# Altium PCB ANALOG_CAN2.PcbDoc (part 1 of 2)
Units mm, origin at the board's own origin, x right, y up, seen from the top; angles counter-clockwise.
Board outline 100 x 55 mm, 2 copper layers (Top Layer, Bottom Layer); 137 components, 132 nets, 459 pads, 72 vias.
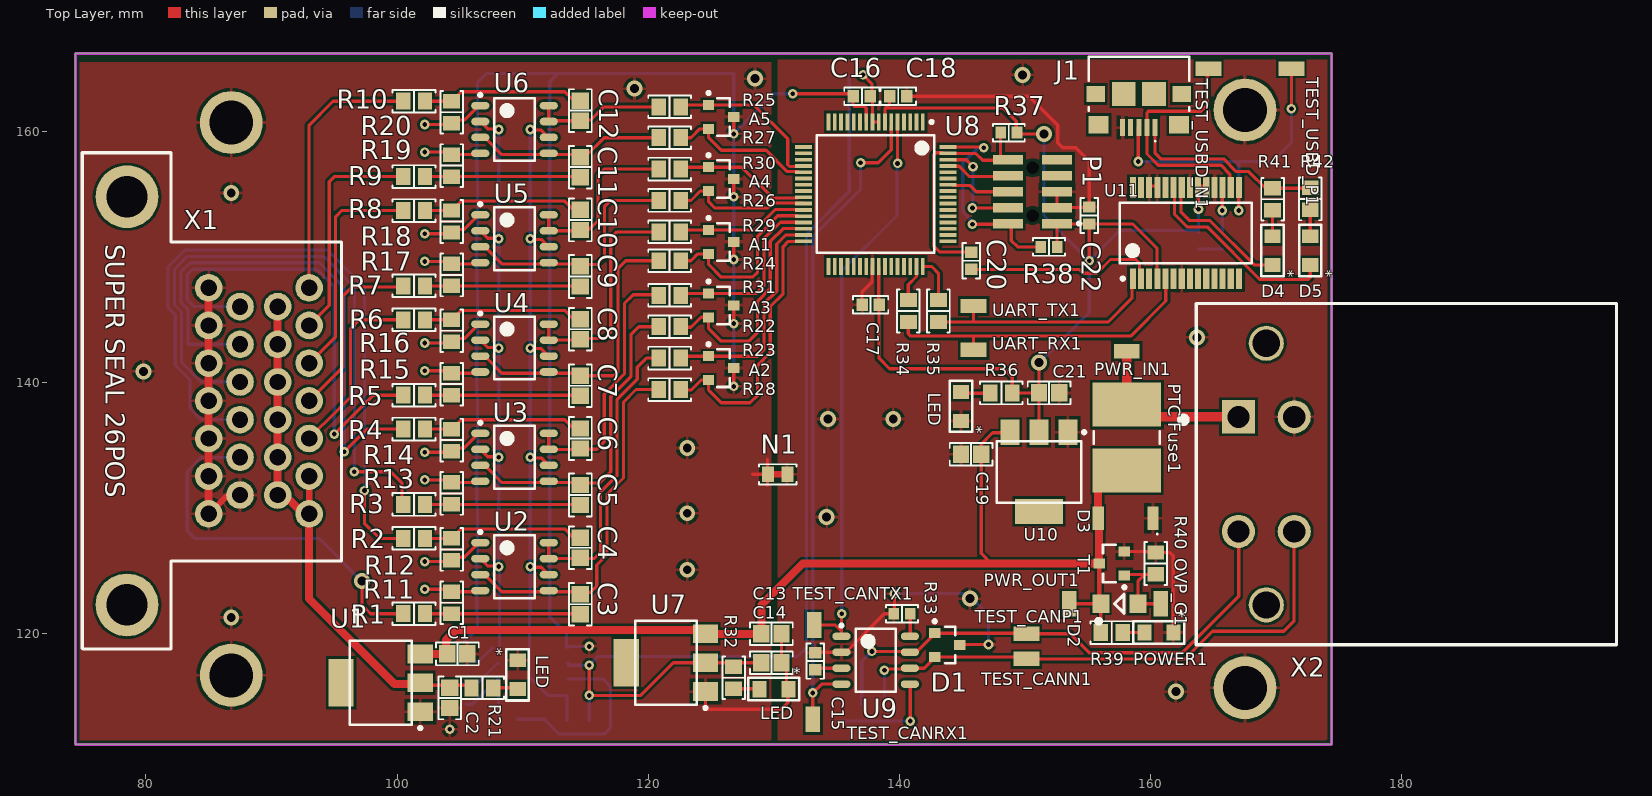
[diagram p0: Top Layer view]
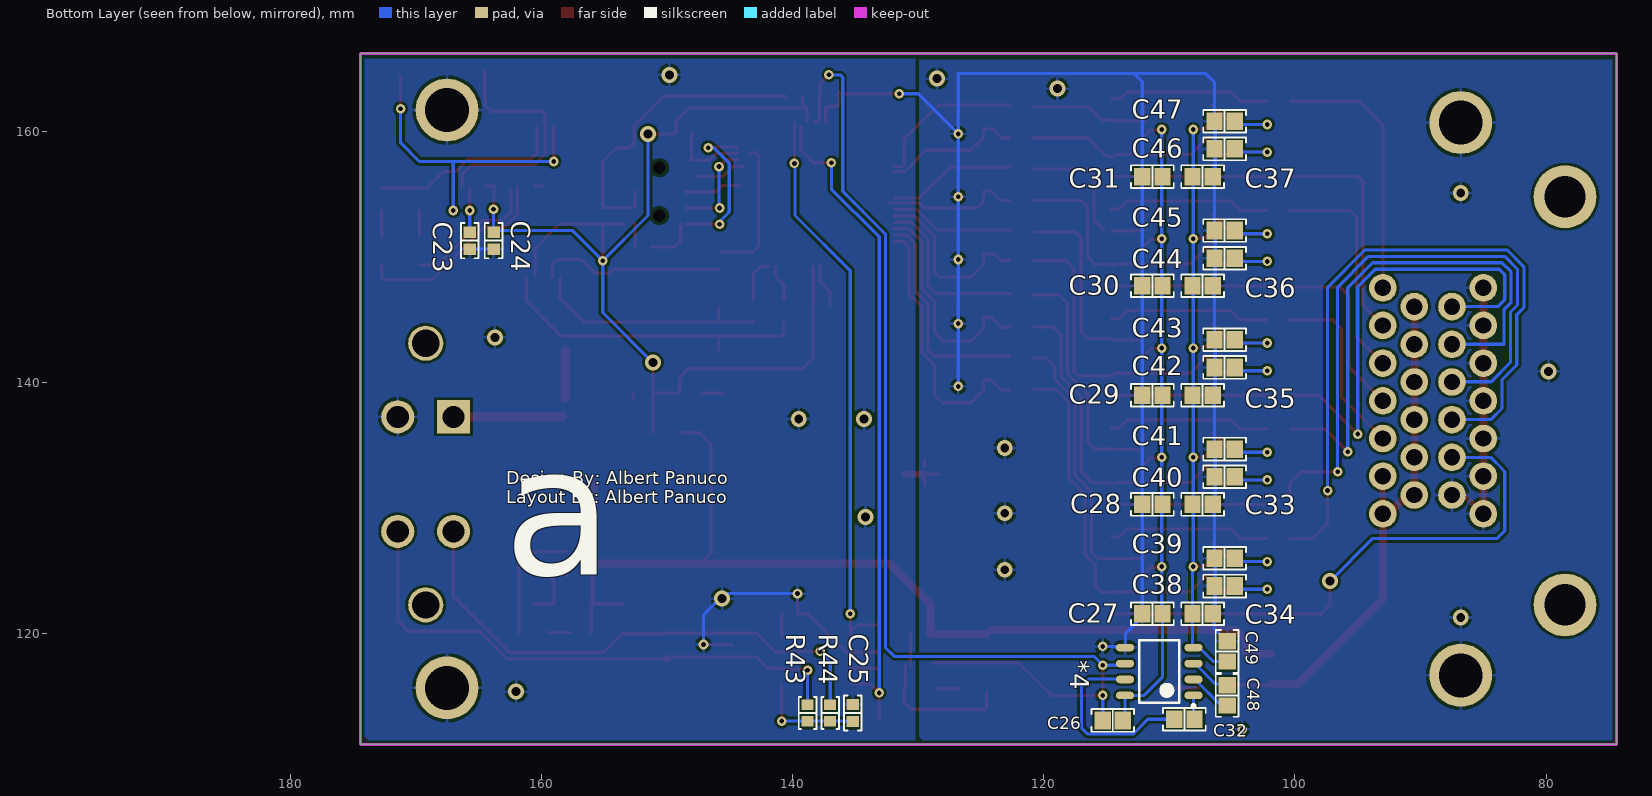
[diagram p1: Bottom Layer view, seen from below]
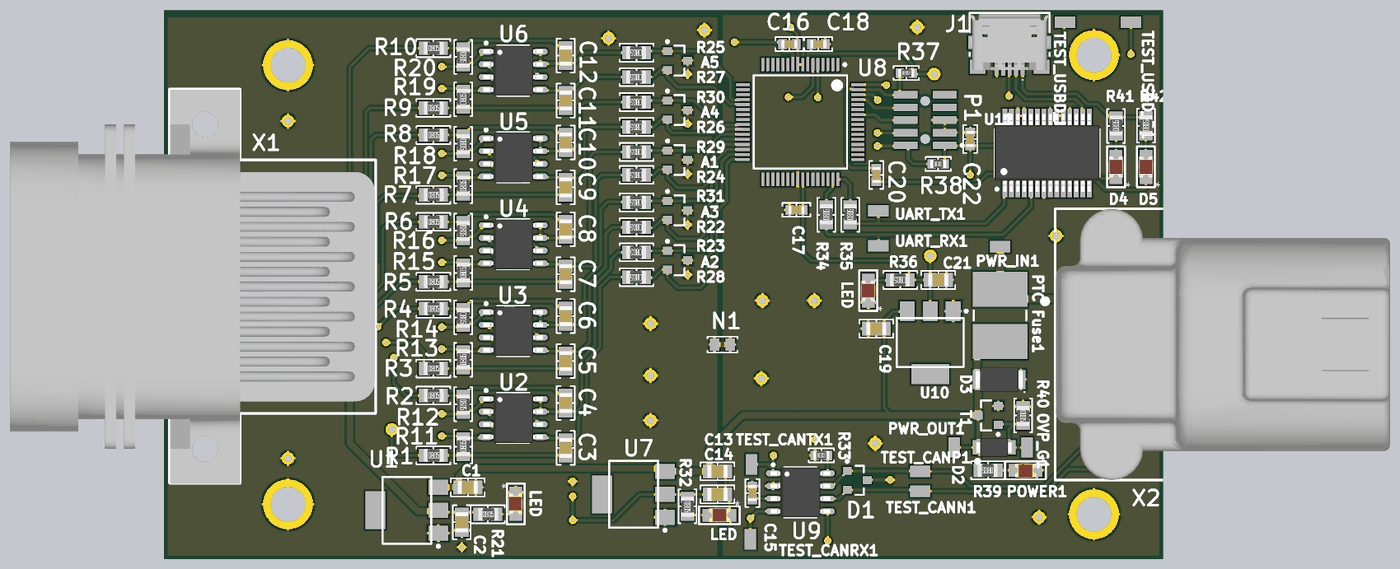
[diagram p3: 3D render of the assembled board from above, using the file's embedded part models]
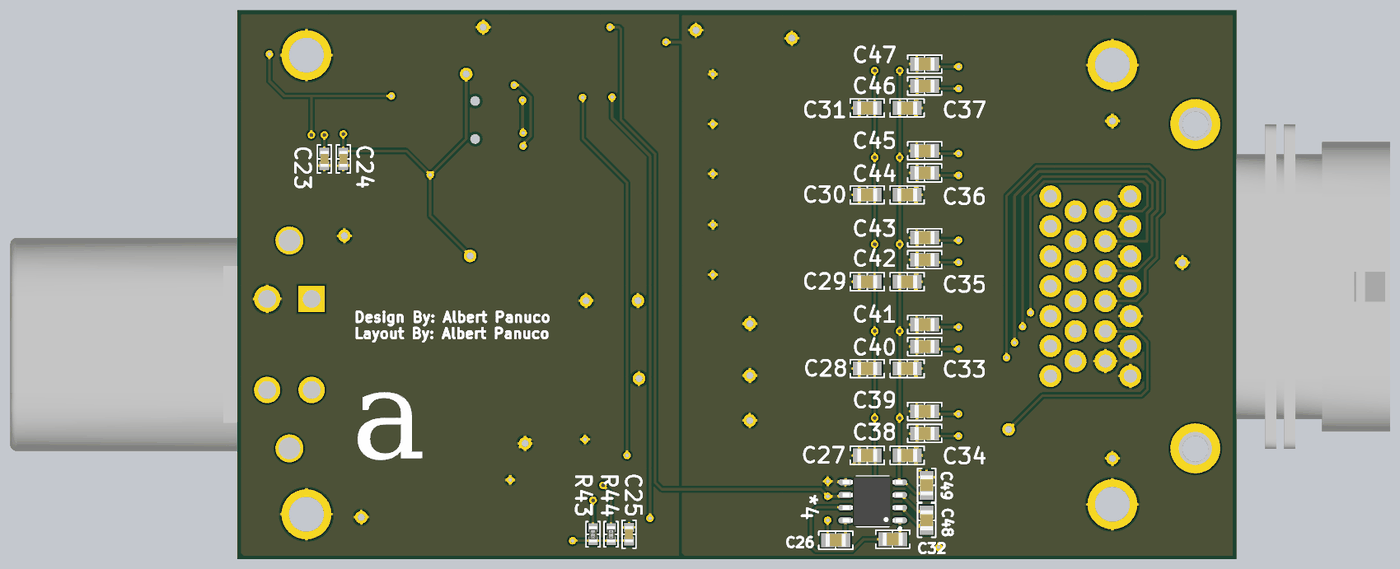
[diagram p4: 3D render of the assembled board from below, using the file's embedded part models]

## Layer stack, top to bottom
Top Solder: solder mask 0.0102, Solder Resist, Dk 3.5
Top Layer: signal copper 0.0356
Dielectric 1: dielectric 0.32, FR-4, Dk 4.8
Bottom Layer: signal copper 0.0356
Bottom Solder: solder mask 0.0102, Solder Resist, Dk 3.5

## Board outline
74.4,111.2 174.4,111.2 174.4,166.2 74.4,166.2

## Design rules (kind name [scope] priority, off if disabled: settings)
BoardOutlineClearance [All] p1: gap=0.254 ignorepadtopadclearanceinfootprint=FALSE except(0: Arc-SplitContinuation Track-SplitContinuation SMDPad-SplitContinuation THPad-SplitContinuation Via-SplitContinuation Fill-SplitContinuation Poly-SplitContinuation Region-SplitContinuation Text-SplitContinuation)
Clearance [All] p1: gap=0.203 ignorepadtopadclearanceinfootprint=FALSE except(0.152: SMDPad-SMDPad; 0.254: Fill-Hole Poly-Hole Region-Hole)
DiffPairsRouting [All] p1: maxlimit=0.254 minlimit=0.254 mostfreqgap=0.254 toplayer_minwidth=0.381 toplayer_maxwidth=0.381 toplayer_prefwidth=0.381 bottomlayer_minwidth=0.381 bottomlayer_maxwidth=0.381 bottomlayer_prefwidth=0.381 maxuncoupledlength=12.7
MatchedLengths "Schematic Matched Net Lengths" [InNet('D_N')] p1: tolerance=0.254 checknetsindiffpair=FALSE checkdiffpairvsdiffpair=TRUE checkxsignals=TRUE checkothers=TRUE
PolygonConnect [All] p1: connectstyle=Relief reliefconductorwidth=0.254 reliefentries=4 polygonreliefangle="90 Angle" airgapwidth=0.254
RoutingVias [All] p1: holewidth=0.711 width=1.27 viastyle="Through Hole" minholewidth=0.711 minwidth=1.27 maxholewidth=0.711 maxwidth=1.27
SolderMaskExpansion [All] p1: expansion=0.102
Width [All] p1: maxlimit=5.08 minlimit=0.254 preferedwidth=0.254 minimp=50.000000 maximp=50.000000 favimp=50.000000
29 further rules are at their usual default settings.

## Classes and differential pairs
component class U_OVP_MCU_PINS: A1 A2 A3 A4 A5 R7 R9 R10 R11 R15 R23 R25 R30 R31 R34 R53 R66
channel class "Sallen-Key Filter": "U_Sallen-Key Filter1" "U_Sallen-Key Filter2" "U_Sallen-Key Filter3" "U_Sallen-Key Filter4" "U_Sallen-Key Filter5"
component class U_USB: C3 C16 C20 D4 D5 J1 R11 R23 R25 R34 R49 TEST_USBD_N1 TEST_USBD_P1 U8 UART_RX1 UART_TX1
component class "U_Sallen-Key Filter5": C7 C18_SKF1 C19-SKF1 C29 C32 C35 C42 C43 C48 C49 OP_SKF1 R5 R15 R15_SKF1 R16 R17_SKF1 R25 R75 R76 R77 R78 U4
component class "U_Sallen-Key Filter4": C2 C6 "C22_U_Sallen-Key Filter4" C28 C33 C40 C41 R23 R34 R35 R39 U1
component class "U_Sallen-Key Filter3": C9 C10 C30 C36 C44 C45 C54 C55 C56 C57 R7 R17 R30 R33 U8
component class "U_Sallen-Key Filter2": C11 "C22_U_Sallen-Key Filter2" C25 C31 C37 C46 C47 R9 R10 R20 R38 R67 R69 R70 R71 U6
component class "U_Sallen-Key Filter1": C3 C16 "C20_U_Sallen-Key Filter1" "C22_U_Sallen-Key Filter1" C27 C34 C38 C39 R11 R31 R32 R36 R68 R72 R73 R74 U2 "U4_U_Sallen-Key Filter1"
component class U_RVP_OVP_LC: D2 D3 OVP_G1 POWER1 PWR_IN1 PWR_OUT1 R5 R39 T1
component class U_MCU_MKE185F512VLH16: C16 C18 C20 C22 P1 R20 R38 TEST_CANRX1 TEST_CANTX1 U6
component class U_MAX680_10V_Converter: *4 C9 C10 C11 C25
component class U_Connectors: X1 X2
component class U_CAN_Tranceiver: C6 C25 D3 R16 R17 R33 TEST_CANN1 TEST_CANP1 U8
component class "U_5V Reference": *4 *6 *7 C3 C6 C7 C16 C22 C32 LED R32 R35 R36 R103 U1 U2 U4
component class TopLevel: N1 "PTC Fuse1"
differential pair D: +D_P -D_N

## Components (designator, comment, footprint, x,y, rotation, side; value= is the part's Value field where it differs from the comment)
*4 "Null" SOIC-8 110.8,117 r0 bottom value=10V
A1 "AZ23C4V7-7-F" SOT23-3 125.8,151.2 r0 top value=4.7V (schematic designator A3)
A2 "AZ23C4V7-7-F" SOT23-3 125.8,141.15 r0 top value=4.7V (schematic designator A5)
A3 "AZ23C4V7-7-F" SOT23-3 125.8,146.15 r0 top value=4.7V (schematic designator A4)
A4 "AZ23C4V7-7-F" SOT23-3 125.8,156.2 r0 top value=4.7V (schematic designator A2)
A5 "AZ23C4V7-7-F" SOT23-3 125.8,161.15 r0 top value=4.7V (schematic designator A1)
C1 "Capacitor MLCC 2.2uf 25V CAP 0805/2012" "CAP 0805/2012" 104.8,118.4 r180 top value=2.2uf (schematic designator C6)
C2 "Capacitor MLCC 2.2uf 25V CAP 0805/2012" "CAP 0805/2012" 104.2,114.9 r90 top value=2.2uf (schematic designator C5)
C3 "Capacitor MLCC 0.10uf 25V CAP 0805/2012" "CAP 0805/2012" 114.6,122.35 r90 top value=0.10uf (schematic designator C23)
C4 "Capacitor MLCC 0.10uf 25V CAP 0805/2012" "CAP 0805/2012" 114.6,126.85 r270 top value=0.10uf (schematic designator C20)
C5 "Capacitor MLCC 0.10uf 25V CAP 0805/2012" "CAP 0805/2012" 114.6,131.05 r90 top value=0.10uf (schematic designator C23)
C6 "Capacitor MLCC 0.10uf 25V CAP 0805/2012" "CAP 0805/2012" 114.6,135.55 r270 top value=0.10uf (schematic designator C20)
C7 "Capacitor MLCC 0.10uf 25V CAP 0805/2012" "CAP 0805/2012" 114.6,139.75 r90 top value=0.10uf (schematic designator C23)
C8 "Capacitor MLCC 0.10uf 25V CAP 0805/2012" "CAP 0805/2012" 114.6,144.25 r270 top value=0.10uf (schematic designator C20)
C9 "Capacitor MLCC 0.10uf 25V CAP 0805/2012" "CAP 0805/2012" 114.6,148.45 r90 top value=0.10uf (schematic designator C23)
C10 "Capacitor MLCC 0.10uf 25V CAP 0805/2012" "CAP 0805/2012" 114.6,152.95 r270 top value=0.10uf (schematic designator C20)
C11 "Capacitor MLCC 0.10uf 25V CAP 0805/2012" "CAP 0805/2012" 114.6,157.15 r90 top value=0.10uf (schematic designator C23)
C12 "Capacitor MLCC 0.10uf 25V CAP 0805/2012" "CAP 0805/2012" 114.6,161.65 r270 top value=0.10uf (schematic designator C20)
C13 "Capacitor MLCC 2.2uf 25V CAP 0805/2012" "CAP 0805/2012" 129.8,120 r180 top value=2.2uf (schematic designator C3)
C14 "Capacitor MLCC 2.2uf 25V CAP 0805/2012" "CAP 0805/2012" 129.8,117.7 r180 top value=2.2uf (schematic designator C4)
C15 "Capacitor MLCC 0.10uf 50V CAP 0603/1608" "CAP 0603/1608" 133.3,117.825 r270 top value=0.10uf (schematic designator C11)
C16 "Capacitor MLCC 0.10uf 25V CAP 0603/1608" "CAP 0603/1608" 137,162.8 r0 top value=0.10uf (schematic designator C14)
C17 "Capacitor MLCC 100pf 25V CAP 0603/1608" "CAP 0603/1608" 137.7,146.2 r0 top value=100pf (schematic designator C15)
C18 "Capacitor MLCC 0.10uf 25V CAP 0603/1608" "CAP 0603/1608" 139.9,162.8 r180 top value=0.10uf (schematic designator C16)
C19 "Capacitor MLCC 2.2uf 25V CAP 0805/2012" "CAP 0805/2012" 145.7,134.3 r0 top value=2.2uf (schematic designator C1)
C20 "Capacitor MLCC 0.10uf 25V CAP 0603/1608" "CAP 0603/1608" 145.7,149.7 r90 top value=0.10uf (schematic designator C17)
C21 "Capacitor MLCC 2.2uf 25V CAP 0805/2012" "CAP 0805/2012" 151.909,139.179 r180 top value=2.2uf (schematic designator C2)
C22 "Capacitor MLCC 0.10uf 16V CAP 0603/1608" "CAP 0603/1608" 155.1,153.3 r270 top value=0.10uf (schematic designator C13)
C23 "Capacitor MLCC 0.10uf 25V CAP 0603/1608" "CAP 0603/1608" 165.7,151.3 r90 bottom value=0.10uf (schematic designator C19)
C24 "Capacitor MLCC 0.10uf 25V CAP 0603/1608" "CAP 0603/1608" 163.8,151.3 r90 bottom value=0.10uf (schematic designator C18)
C25 "Capacitor MLCC 4700pf 50V CAP 0603/1608" "CAP 0603/1608" 135.2,113.7 r270 bottom value=4700pf (schematic designator C12)
C26 "Capacitor MLCC 4.7uf 16V CAP 0805/2012" "CAP 0805/2012" 114.5,113.1 r0 bottom value=4.7uf (schematic designator C7)
C27 "Capacitor MLCC 0.10uf 25V CAP 0805/2012" "CAP 0805/2012" 111.35,121.6 r180 bottom value=0.10uf (schematic designator C21)
C28 "Capacitor MLCC 0.10uf 25V CAP 0805/2012" "CAP 0805/2012" 111.35,130.3 r180 bottom value=0.10uf (schematic designator C21)
C29 "Capacitor MLCC 0.10uf 25V CAP 0805/2012" "CAP 0805/2012" 111.35,139 r180 bottom value=0.10uf (schematic designator C21)
C30 "Capacitor MLCC 0.10uf 25V CAP 0805/2012" "CAP 0805/2012" 111.35,147.7 r180 bottom value=0.10uf (schematic designator C21)
C31 "Capacitor MLCC 0.10uf 25V CAP 0805/2012" "CAP 0805/2012" 111.35,156.4 r180 bottom value=0.10uf (schematic designator C21)
C32 "Capacitor MLCC 4.7uf 16V CAP 0805/2012" "CAP 0805/2012" 108.8,113.2 r0 bottom value=4.7uf (schematic designator C8)
C33 "Capacitor MLCC 0.10uf 25V CAP 0805/2012" "CAP 0805/2012" 107.35,130.3 r180 bottom value=0.10uf (schematic designator C24)
C34 "Capacitor MLCC 0.10uf 25V CAP 0805/2012" "CAP 0805/2012" 107.35,121.6 r180 bottom value=0.10uf (schematic designator C24)
C35 "Capacitor MLCC 0.10uf 25V CAP 0805/2012" "CAP 0805/2012" 107.35,139 r180 bottom value=0.10uf (schematic designator C24)
C36 "Capacitor MLCC 0.10uf 25V CAP 0805/2012" "CAP 0805/2012" 107.35,147.7 r180 bottom value=0.10uf (schematic designator C24)
C37 "Capacitor MLCC 0.10uf 25V CAP 0805/2012" "CAP 0805/2012" 107.35,156.4 r180 bottom value=0.10uf (schematic designator C24)
C38 "Capacitor MLCC 2200pf 25V CAP 0805/2012" "CAP 0805/2012" 105.6,123.804 r180 bottom value=2200pf (schematic designator C25)
C39 "Capacitor MLCC 2200pf 25V CAP 0805/2012" "CAP 0805/2012" 105.6,126.009 r180 bottom value=2200pf (schematic designator C22)
C40 "Capacitor MLCC 2200pf 25V CAP 0805/2012" "CAP 0805/2012" 105.6,132.504 r180 bottom value=2200pf (schematic designator C25)
C41 "Capacitor MLCC 2200pf 25V CAP 0805/2012" "CAP 0805/2012" 105.6,134.709 r180 bottom value=2200pf (schematic designator C22)
C42 "Capacitor MLCC 2200pf 25V CAP 0805/2012" "CAP 0805/2012" 105.6,141.204 r180 bottom value=2200pf (schematic designator C25)
C43 "Capacitor MLCC 2200pf 25V CAP 0805/2012" "CAP 0805/2012" 105.6,143.409 r180 bottom value=2200pf (schematic designator C22)
C44 "Capacitor MLCC 2200pf 25V CAP 0805/2012" "CAP 0805/2012" 105.6,149.904 r180 bottom value=2200pf (schematic designator C25)
C45 "Capacitor MLCC 2200pf 25V CAP 0805/2012" "CAP 0805/2012" 105.6,152.108 r180 bottom value=2200pf (schematic designator C22)
C46 "Capacitor MLCC 2200pf 25V CAP 0805/2012" "CAP 0805/2012" 105.6,158.604 r180 bottom value=2200pf (schematic designator C25)
C47 "Capacitor MLCC 2200pf 25V CAP 0805/2012" "CAP 0805/2012" 105.6,160.808 r180 bottom value=2200pf (schematic designator C22)
C48 "Capacitor MLCC 4.7uf 16V CAP 0805/2012" "CAP 0805/2012" 105.4,115.1 r270 bottom value=4.7uf (schematic designator C9)
C49 "Capacitor MLCC 4.7uf 16V CAP 0805/2012" "CAP 0805/2012" 105.4,118.6 r270 bottom value=4.7uf (schematic designator C10)
D1 "NUP1105LT1G" "SOT-23 (TO-236)" 143.8,119.1 r0 top value=TVS_24V (schematic designator D3)
D2 "DDZ9701-7" SOD123F 157.5,122.4 r180 top value=14Vz (schematic designator D1)
D3 "DIODE" SOD-128 158,129.2 r180 top value=5A (schematic designator D2)
D4 "" 0805_LED 169.7,150.5 r270 top value=Red (schematic designator D5)
D5 "" 0805_LED 172.7,150.5 r270 top value=Green (schematic designator D4)
J1 "1981568-1" TECO-1981568-5_V 159.05,160.3 r180 top value=CONN
LED "LED" 0805_LED 109.6,116.75 r90 top value=Green (schematic designator *3)
LED "LED" 0805_LED 130,115.6 r0 top value=Green (schematic designator *2)
LED "LED" 0805_LED 144.9,138.1 r270 top value=Green (schematic designator *1)
N1 "Net_Tie" Net_Tie 130.3,132.7 r0 top net-tie
OVP_G1 "RCU-0C" RCU-0C 160.8,122.4 r180 top
P1 "5103309-1" HDR2X5_SMT 150.6,155.2 r90 top value=CONN
POWER1 "LED" 0805_LED 160.65,120.1 r0 top value=Green
"PTC Fuse1" "PTC Fuse" "PTC Fuse 2920/07351" 158.1,135.625 r90 top value="2A hold, 4A trip, 40A max"
PWR_IN1 "RCU-0C" RCU-0C 158.1,142.5 r270 top
PWR_OUT1 "RCU-0C" RCU-0C 153.5,122.4 r180 top
R1 "Resistor 24k 0805 1/10W 1%" "RES 0805/2012" 101.35,121.6 r0 top value=24k (schematic designator R27)
R2 "Resistor 24k 0805 1/10W 1%" "RES 0805/2012" 101.35,127.6 r0 top value=24k (schematic designator R25)
R3 "Resistor 24k 0805 1/10W 1%" "RES 0805/2012" 101.35,130.3 r0 top value=24k (schematic designator R27)
R4 "Resistor 24k 0805 1/10W 1%" "RES 0805/2012" 101.35,136.3 r0 top value=24k (schematic designator R25)
R5 "Resistor 24k 0805 1/10W 1%" "RES 0805/2012" 101.35,139 r0 top value=24k (schematic designator R27)
R6 "Resistor 24k 0805 1/10W 1%" "RES 0805/2012" 101.35,145 r0 top value=24k (schematic designator R25)
R7 "Resistor 24k 0805 1/10W 1%" "RES 0805/2012" 101.35,147.7 r0 top value=24k (schematic designator R27)
R8 "Resistor 24k 0805 1/10W 1%" "RES 0805/2012" 101.35,153.7 r0 top value=24k (schematic designator R25)
R9 "Resistor 24k 0805 1/10W 1%" "RES 0805/2012" 101.35,156.4 r0 top value=24k (schematic designator R27)
R10 "Resistor 24k 0805 1/10W 1%" "RES 0805/2012" 101.35,162.4 r0 top value=24k (schematic designator R25)
R11 "Resistor 9.1k 0805 1/10W 1%" "RES 0805/2012" 104.35,122.475 r90 top value=9.1k (schematic designator R28)
R12 "Resistor 9.1k 0805 1/10W 1%" "RES 0805/2012" 104.35,126.725 r270 top value=9.1k (schematic designator R26)
R13 "Resistor 9.1k 0805 1/10W 1%" "RES 0805/2012" 104.35,131.175 r90 top value=9.1k (schematic designator R28)
R14 "Resistor 9.1k 0805 1/10W 1%" "RES 0805/2012" 104.35,135.425 r270 top value=9.1k (schematic designator R26)
R15 "Resistor 9.1k 0805 1/10W 1%" "RES 0805/2012" 104.35,139.875 r90 top value=9.1k (schematic designator R28)
R16 "Resistor 9.1k 0805 1/10W 1%" "RES 0805/2012" 104.35,144.125 r270 top value=9.1k (schematic designator R26)
R17 "Resistor 9.1k 0805 1/10W 1%" "RES 0805/2012" 104.35,148.575 r90 top value=9.1k (schematic designator R28)
R18 "Resistor 9.1k 0805 1/10W 1%" "RES 0805/2012" 104.35,152.825 r270 top value=9.1k (schematic designator R26)
R19 "Resistor 9.1k 0805 1/10W 1%" "RES 0805/2012" 104.35,157.275 r90 top value=9.1k (schematic designator R28)
R20 "Resistor 9.1k 0805 1/10W 1%" "RES 0805/2012" 104.35,161.525 r270 top value=9.1k (schematic designator R26)
R21 "Resistor 470 0805 1/10W 1%" "RES 0805/2012" 106.8,115.7 r0 top value=470 (schematic designator R3)
R22 "Resistor 2.2k 0805 1/4W 5%" "RES 0805/2012" 121.7,144.45 r180 top value=2.2k (schematic designator R13)
R23 "Resistor 2.2k 0805 1/4W 5%" "RES 0805/2012" 121.7,141.95 r180 top value=2.2k (schematic designator R14)
R24 "Resistor 2.2k 0805 1/4W 5%" "RES 0805/2012" 121.7,149.7 r180 top value=2.2k (schematic designator R11)
R25 "Resistor 2.2k 0805 1/4W 5%" "RES 0805/2012" 121.7,161.95 r180 top value=2.2k (schematic designator R6)
R26 "Resistor 2.2k 0805 1/4W 5%" "RES 0805/2012" 121.7,154.5 r180 top value=2.2k (schematic designator R9)
R27 "Resistor 2.2k 0805 1/4W 5%" "RES 0805/2012" 121.7,159.5 r180 top value=2.2k (schematic designator R7)
R28 "Resistor 2.2k 0805 1/4W 5%" "RES 0805/2012" 121.7,139.45 r180 top value=2.2k (schematic designator R15)
R29 "Resistor 2.2k 0805 1/4W 5%" "RES 0805/2012" 121.7,152 r180 top value=2.2k (schematic designator R10)
R30 "Resistor 2.2k 0805 1/4W 5%" "RES 0805/2012" 121.7,157 r180 top value=2.2k (schematic designator R8)
R31 "Resistor 2.2k 0805 1/4W 5%" "RES 0805/2012" 121.7,146.95 r180 top value=2.2k (schematic designator R12)
R32 "Resistor 470 0805 1/10W 1%" "RES 0805/2012" 126.8,116.5 r270 top value=470 (schematic designator R2)
R33 "Resistor 100 0603 1/10W 10%" "RES 0603/1608" 140.2,121.6 r0 top value=100 (schematic designator R18)
R34 "Resistor 1.0k 0805 1/4W 1%" "RES 0805/2012" 140.7,145.7 r90 top value=1.0k (schematic designator R22)
R35 "Resistor 1.0k 0805 1/4W 1%" "RES 0805/2012" 143.1,145.7 r90 top value=1.0k (schematic designator R21)
R36 "Resistor 470 0805 1/10W 1%" "RES 0805/2012" 148.105,139.179 r180 top value=470 (schematic designator R1)
R37 "Resistor 10k 0603 1/10W 5%" "RES 0603/1608" 148.7,159.9 r0 top value=10k (schematic designator R20)
R38 "Resistor 10k 0603 1/10W 1%" "RES 0603/1608" 151.9,150.8 r0 top value=10k (schematic designator R19)
R39 "Resistor 470 0805 1/10W 1%" "RES 0805/2012" 156.9,120.1 r180 top value=470 (schematic designator R4)
R40 "Resistor 47k 0805 1/10W 1%" "RES 0805/2012" 160.4,125.6 r270 top value=47k (schematic designator R5)
R41 "Resistor 1.0k 0805 1/4W 1%" "RES 0805/2012" 169.7,154.6 r90 top value=1.0k (schematic designator R24)
R42 "Resistor 1.0k 0805 1/4W 1%" "RES 0805/2012" 172.7,154.625 r90 top value=1.0k (schematic designator R23)
R43 "Resistor 62 0603 1/10W 5%" "RES 0603/1608" 138.8,113.7 r270 bottom value=62 (schematic designator R16)
R44 "Resistor 62 0603 1/10W 5%" "RES 0603/1608" 137,113.7 r90 bottom value=62 (schematic designator R17)
T1 "DMG2302UK-7" SOT23-3 156.9,125.6 r180 top value=N_Channel
TEST_CANN1 "RCU-0C" RCU-0C 150.1,118 r90 top
TEST_CANP1 "RCU-0C" RCU-0C 150.1,120 r90 top
TEST_CANRX1 "RCU-0C" RCU-0C 133.1,113.2 r180 top
TEST_CANTX1 "RCU-0C" RCU-0C 133.2,120.7 r180 top
TEST_USBD_N1 "RCU-0C" RCU-0C 164.6,165 r90 top
TEST_USBD_P1 "RCU-0C" RCU-0C 171.2,165 r90 top
U1 "NCP1117ST33T3G" SOT-223-3 98.7,116.1 r180 top value="3.3V 1.0A" (schematic designator U3)
U2 "LT1057IS8#PBF" SOIC-8 109.35,125.35 r0 top (schematic designator U7)
U3 "LT1057IS8#PBF" SOIC-8 109.35,134.05 r0 top (schematic designator U7)
U4 "LT1057IS8#PBF" SOIC-8 109.35,142.75 r0 top (schematic designator U7)
U5 "LT1057IS8#PBF" SOIC-8 109.35,151.45 r0 top (schematic designator U7)
U6 "LT1057IS8#PBF" SOIC-8 109.35,160.15 r0 top (schematic designator U7)
U7 "NCP1117ST33T3G" SOT-223-3 121.4,117.7 r180 top value="3.3V 1.0A" (schematic designator U2)
U8 "" TQFP64 138.1,155 r270 top (schematic designator U5)
U9 "MCP2561 CAN Transceiver" SOIC-8 138.1,117.9 r0 top value=CAN/UART (schematic designator U4)
U10 "NCP1117ST33T3G" SOT-223-3 151.1,132.9 r270 top value="3.3V 1.0A" (schematic designator U1)
U11 "FT232RL" SSOP-28 162.8,151.9 r90 top (schematic designator U6)
UART_RX1 "RCU-0C" RCU-0C 145.9,142.6 r270 top
UART_TX1 "RCU-0C" RCU-0C 145.9,146.1 r270 top
X1 "6437288-4" "SUPERSEAL 26POS 90Deg" 78.5,154.8 r270 top value=CONN (schematic designator X2)
X2 "DTF13-4P" DTF13-4P 169.2,132.715 r90 top value=CONN (schematic designator X1)

## Footprints (in the part's own frame and the unit in brackets; to place one, negate y for a bottom-side part, rotate by r counter-clockwise, add the part's x,y. Pads: shape width x height; smd on the part's side, far side on the other; paste and mask are expansions set on the pad)
0805_LED [mm]
  rect 1.1x1.3 smd: 1(-1.15,0) 2(1.15,0)
  silkscreen extent -2.06,-0.89 2.03,0.89, body extent -1.05,-0.67 1.05,0.68, height 0.9
"CAP 0603/1608" [mm] "Chip Capacitor, 2-Leads, Body 1.60x0.80mm, IPC Medium Density"
  rect 0.9x1 smd: 1(-0.675,0) 2(0.675,0)
  silkscreen extent -1.4,-0.7 1.4,0.7, body extent -0.8,-0.41 0.8,0.41, height 0.82
"CAP 0805/2012" [mm] "Chip Capacitor, 2-Leads, Body 2.00x1.20mm, IPC Medium Density"
  rect 1.3x1.4 smd: 1(-0.8,0) 2(0.8,0)
  silkscreen extent -1.7,-0.9 1.7,0.9, body extent -1,-0.64 1,0.64, height 1.26
DTF13-4P [mm]
  rect 2.64x2.64 hole 1.76: 1(4.561,2.223)
  round 2.64 hole 1.76: 2(4.561,-2.227) 3(-4.559,-2.227) 4(-4.559,2.223)
  round 2.8 hole 2.16 unplated: None(-10.415,0) None(10.415,0)
  silkscreen extent -13.59,-27.88 13.59,6.85, body extent -13.59,-27.94 13.59,5.52, height 23.53
HDR2X5_SMT [mm] "Header, 10-Leads, Body 3.43x6.35mm, Pitch 1.27mm"
  rect 0.76x2.4 smd: 1(-2.54,-1.95) 2(-2.54,1.95) 3(-1.27,-1.95) 4(-1.27,1.95) 5(0,-1.95) 6(0,1.95) 7(1.27,-1.95) 8(1.27,1.95) 9(2.54,-1.95) 10(2.54,1.95)
  round 0 hole 1 unplated: MH1(-1.905,0) MH2(1.905,0)
  silkscreen extent -2.66,-3.83 -2.42,-3.58, body extent -3.17,-1.72 3.17,1.72, height 4.55
Net_Tie [mm] "Chip Resistor, 2-Leads, Body 2.00x1.25mm, IPC High Density"
  rect 0.95x1.25 smd: 1(-0.775,0) 2(0.775,0)
  Top Layer lines w0.5: -0.8,0 0.775,0 0.8,0
  silkscreen extent -1.5,-0.8 1.5,0.8
"PTC Fuse 2920/07351" [mm] "Chip PTC Fuse, 2-Leads, Body 7.36x5.12mm, IPC Medium Density"
  rect 3.5x5.45 smd: 1(-2.625,0) 2(2.625,0)
  silkscreen extent -0.5,-2.63 0.5,2.63, body extent -3.99,-2.72 3.99,2.72, height 1.25
RCU-0C [mm]
  rect 1.15x2.05 smd: 1(0,0)
"RES 0603/1608" [mm] "Chip Resistor, 2-Leads, Body 1.60x0.80mm, IPC Medium Density"
  rect 0.85x0.95 smd: 1(-0.65,0) 2(0.65,0)
  silkscreen extent -1.27,-0.7 1.27,0.7, body extent -0.8,-0.4 0.8,0.4, height 0.45
"RES 0805/2012" [mm] "Chip Resistor, 2-Leads, Body 2.00x1.25mm, IPC Medium Density"
  rect 1.15x1.35 smd: 1(-0.875,0) 2(0.875,0)
  silkscreen extent -1.7,-0.9 1.7,0.9, body extent -0.95,-0.62 1.05,0.63, height 0.6
SOD123F [mm] "SODFL, 2-Leads, Body 1.80x3.50mm, IPC Low Density"
  rect 1.35x1.45 smd: 1(-1.475,0) 2(1.475,0)
  silkscreen extent -0.38,-0.76 1.75,1.5, body extent -1.75,-0.95 1.75,0.95, height 1.15
SOD-128 [mm] "SOD-128, 2-Leads, Body 2.40x4.70mm, IPC Medium Density"
  rect 0.9x1.9 smd: 1(-2.175,0) 2(2.175,0)
  silkscreen extent -2.57,1.2 -2.48,1.3, body extent -2.35,-1.25 2.35,1.25, height 0.85
SOIC-8 [mm] "SOIC, 8-Leads, Body 4.90x3.90mm, Pitch 1.27mm, IPC Medium Density"
  oval 1.45x0.6 smd: 1(-2.725,1.905) 2(-2.725,0.635) 3(-2.725,-0.635) 4(-2.725,-1.905) 5(2.725,-1.905) 6(2.725,-0.635) 7(2.725,0.635) 8(2.725,1.905)
  silkscreen extent -2.85,-2.5 1.6,2.88, body extent -3,-2.5 3,2.5, height 1.75
SOT23-3 [mm] "SOT23, 3-Leads, Body 2.92x2.37mm, Pitch 0.95mm, IPC Medium Density, NUP2105L"
  rect 0.9x0.8 smd: 1(-1,0.95) 2(-1,-0.95) 3(1,0)
  silkscreen extent -1.12,-1.5 0.7,2.02, body extent -0.7,-1.52 0.7,1.52, height 1.11
"SOT-23 (TO-236)" [mm]
  rect 0.9x0.8 smd: 1(-1,0.95) 2(-1,-0.95) 3(1,0)
  silkscreen extent -1.12,-1.46 0.65,2.02, body extent -0.65,-1.46 0.65,1.46, height 1.11
SOT-223-3 [mm] "SOT223127P600-8N, NCP1117STAT3G, MMBT4403-7-F"
  rect 2x1.5 smd: 1(-3.15,2.3) 2(-3.15,0) 3(-3.15,-2.3)
  rect 2x3.8 smd: THM(3.15,0)
  silkscreen extent -3.27,-3.35 2.45,3.72, body extent -1.85,-3.35 1.85,3.35, height 1.8
SSOP-28 [mm] "hi"
  rect 1.65x0.49 smd: 1(-3.625,4.225) 2(-3.625,3.575) 3(-3.625,2.925) 4(-3.625,2.275) 5(-3.625,1.625) 6(-3.625,0.975) 7(-3.625,0.325) 8(-3.625,-0.325) 9(-3.625,-0.975) 10(-3.625,-1.625) 11(-3.625,-2.275) 12(-3.625,-2.925) 13(-3.625,-3.575) 14(-3.625,-4.225) 15(3.625,-4.225) 16(3.625,-3.575) 17(3.625,-2.925) 18(3.625,-2.275) 19(3.625,-1.625) 20(3.625,-0.975) 21(3.625,-0.325) 22(3.625,0.325) 23(3.625,0.975) 24(3.625,1.625) 25(3.625,2.275) 26(3.625,2.925) 27(3.625,3.575) 28(3.625,4.225)
  silkscreen extent -3.75,-5.25 2.4,5.25, body extent -3.9,-5.25 3.9,5.25, height 2
"SUPERSEAL 26POS 90Deg" [mm]
  round 2.2 hole 1.3: 1(7.25,14.5) 2(10.25,14.5) 3(13.25,14.5) 4(16.25,14.5) 5(19.25,14.5) 6(22.25,14.5) 7(25.25,14.5) 8(8.75,12) 9(11.75,12) 10(14.75,12) 11(17.75,12) 12(20.75,12) 13(23.75,12) 14(8.75,9) 15(11.75,9) 16(14.75,9) 17(17.75,9) 18(20.75,9) 19(23.75,9) 20(7.25,6.5) 21(10.25,6.5) 22(13.25,6.5) 23(16.25,6.5) 24(19.25,6.5) 25(22.25,6.5) 26(25.25,6.5)
  round 5 hole 3.3 unplated: CH(0,0) RH(32.5,0)
  silkscreen extent -3.5,-3.56 36,17.07, body extent -3.45,-19.5 36.05,17, height 27.91
TECO-1981568-5_V [mm] "SMD, 5-Leads, Body 8x5.9mm, Pitch 0.65mm"
  rect 0.4x1.35 smd: 1(-1.3,0) 2(-0.65,0) 3(0,0) 4(0.65,0) 5(1.3,0)
  rect 1.6x1.4 smd: 6(-3.2,-0.225) 7(3.2,-0.225)
  rect 1.45x1.3 smd: 8(-3.425,-2.675) 9(3.425,-2.675)
  rect 1.9x1.9 smd: 10(-1.2,-2.675) 11(1.2,-2.675)
  silkscreen extent -4,-5.63 4,1.12, body extent -4,-5.5 4,0.1, height 2.79
TQFP64 [mm] "TSQFP, 64-Leads, Body 10.00x10.00mm, Pitch 0.50mm, IPC Medium Density, MKE18F512VLH16"
  rect 1.35x0.3 smd: 1(-5.75,3.75) 2(-5.75,3.25) 3(-5.75,2.75) 4(-5.75,2.25) 5(-5.75,1.75) 6(-5.75,1.25) 7(-5.75,0.75) 8(-5.75,0.25) 9(-5.75,-0.25) 10(-5.75,-0.75) 11(-5.75,-1.25) 12(-5.75,-1.75) 13(-5.75,-2.25) 14(-5.75,-2.75) 15(-5.75,-3.25) 16(-5.75,-3.75) 33(5.75,-3.75) 34(5.75,-3.25) 35(5.75,-2.75) 36(5.75,-2.25) 37(5.75,-1.75) 38(5.75,-1.25) 39(5.75,-0.75) 40(5.75,-0.25) 41(5.75,0.25) 42(5.75,0.75) 43(5.75,1.25) 44(5.75,1.75) 45(5.75,2.25) 46(5.75,2.75) 47(5.75,3.25) 48(5.75,3.75)
  rect 0.3x1.35 smd: 17(-3.75,-5.75) 18(-3.25,-5.75) 19(-2.75,-5.75) 20(-2.25,-5.75) 21(-1.75,-5.75) 22(-1.25,-5.75) 23(-0.75,-5.75) 24(-0.25,-5.75) 25(0.25,-5.75) 26(0.75,-5.75) 27(1.25,-5.75) 28(1.75,-5.75) 29(2.25,-5.75) 30(2.75,-5.75) 31(3.25,-5.75) 32(3.75,-5.75) 49(3.75,5.75) 50(3.25,5.75) 51(2.75,5.75) 52(2.25,5.75) 53(1.75,5.75) 54(1.25,5.75) 55(0.75,5.75) 56(0.25,5.75) 57(-0.25,5.75) 58(-0.75,5.75) 59(-1.25,5.75) 60(-1.75,5.75) 61(-2.25,5.75) 62(-2.75,5.75) 63(-3.25,5.75) 64(-3.75,5.75)
  silkscreen extent -5.87,-4.67 4.67,4.68, body extent -5,-5 5,5, height 1.6

## Part data
*4: library part 14, "IC REG SWTCHD CAP INV 10MA 8SOIC", Current_Rating=10mA, Manufacturer_id=1, MfrPartNo=MAX680CSA, Package=SOIC-8, ComponentLink1Description=Null, ComponentLink1URL=Null, Created_By="Albert Panuco", Drawer_id=1, Dropout_Voltage=Null, idPMIC_Lin=14, Link=https://www.digikey.com/product-detail/en/maxim-integrated/MAX680CSA/MAX680CSA-ND/142563, Name=MAX680CSA, Num_Outputs=2, Output_Config=Fixed, Power=Null, Supplier1=Null, Supplier1PartNo=Null, Updated_By=Null, Vin(Max)=6V, Vin(Min)=2V, Vout(Max)=10V, Vout(Min)=+2Vin, Vout_Type=Null
A1 A2 A3 A4 A5: library part 14, "DIODE ZENER ARRAY 4.7V SOT23-3", Manufacturer_id=1, Package=SOT23-3, Power=300mW, Created_By="Angel Delgado", Drawer_id=1, idDiode=14, Link=https://www.digikey.com/product-detail/en/diodes-incorporated/AZ23C4V7-7-F/AZ23C4V7-FDICT-ND/815309, MfrPartNo=AZ23C4V7-7-F, Name=AZ23C4V7-7-F, Num_Circuits=2, Supplier1=Digi-Key, Type="Zener Array"
C1 C2 C13 C14 C19 C21: library part 711, Dielectric=Ceramic, Manufacturer_id=1, Package="CAP 0805/2012", Voltage_Rating=25V, Created_By="Nick Mah", Created_Date=10/20/2018, Drawer_id=1, idCapacitor=711, Name="Cap_2.2uf_25V_CAP 0805/2012"
C3 C4 C5 C6 C7 C8 C9 C10 C11 C12 C27 C28 C29 C30 C31 C33 C34 C35 C36 C37: library part 703, Dielectric=Ceramic, Manufacturer_id=1, Package="CAP 0805/2012", Voltage_Rating=25V, Created_By="Nick Mah", Created_Date=10/20/2018, Drawer_id=1, idCapacitor=703, Name="Cap_0.10uf_25V_CAP 0805/2012"
C15: library part 943, Dielectric=Ceramic, Manufacturer_id=1, Package="CAP 0603/1608", Voltage_Rating=50V, Created_By="Nick Mah", Created_Date=10/20/2018, Drawer_id=1, idCapacitor=943, Name="Cap_0.10uf_50V_CAP 0603/1608"
C16 C18 C20 C23 C24: library part 583, Dielectric=Ceramic, Manufacturer_id=1, Package="CAP 0603/1608", Voltage_Rating=25V, Created_By="Nick Mah", Created_Date=10/20/2018, Drawer_id=1, idCapacitor=583, Name="Cap_0.10uf_25V_CAP 0603/1608"
C17: library part 529, Dielectric=Ceramic, Manufacturer_id=1, Package="CAP 0603/1608", Voltage_Rating=25V, Created_By="Nick Mah", Created_Date=10/20/2018, Drawer_id=1, idCapacitor=529, Name="Cap_100pf_25V_CAP 0603/1608"
C22: library part 223, Dielectric=Ceramic, Manufacturer_id=1, Package="CAP 0603/1608", Voltage_Rating=16V, Created_By="Nick Mah", Created_Date=10/20/2018, Drawer_id=1, idCapacitor=223, Name="Cap_0.10uf_16V_CAP 0603/1608"
C25: library part 929, Dielectric=Ceramic, Manufacturer_id=1, Package="CAP 0603/1608", Voltage_Rating=50V, Created_By="Nick Mah", Created_Date=10/20/2018, Drawer_id=1, idCapacitor=929, Name="Cap_4700pf_50V_CAP 0603/1608"
C26 C32 C48 C49: library part 353, Dielectric=Ceramic, Manufacturer_id=1, Package="CAP 0805/2012", Voltage_Rating=16V, Created_By="Nick Mah", Created_Date=10/20/2018, Drawer_id=1, idCapacitor=353, Name="Cap_4.7uf_16V_CAP 0805/2012"
C38 C39 C40 C41 C42 C43 C44 C45 C46 C47: library part 681, Dielectric=Ceramic, Manufacturer_id=1, Package="CAP 0805/2012", Voltage_Rating=25V, Created_By="Nick Mah", Created_Date=10/20/2018, Drawer_id=1, idCapacitor=681, Name="Cap_2200pf_25V_CAP 0805/2012"
D1: library part 7, "ESD Protection Diode", Manufacturer_id=1, Package=SOT-23, Power=350W, Supplier1PartNo=NUP1105LT1GOSCT-ND, ComponentLink1URL=https://www.digikey.com/product-detail/en/on-semiconductor/NUP1105LT1G/NUP1105LT1GOSCT-ND/2122067, Drawer_id=1, Ic=8A, idDiode=7, Link=https://www.digikey.com/product-detail/en/on-semiconductor/NUP1105LT1G/NUP1105LT1GOSCT-ND/2122067, MfrPartNo=NUP1105LT1G, Name=SOT-23_350W_Zener, Num_Circuits=1, Supplier1=Digikey, Type=Zener
D2: library part 10, "Zener Diode 14V 500mW ±5% Surface Mount SOD-123", Manufacturer_id=8, Package=SOD-123, Power=500mW, Supplier1PartNo=DDZ9701-7DICT-ND, ComponentLink1Description=Datasheet, ComponentLink1URL=https://www.diodes.com/assets/Datasheets/ds30410.pdf, Drawer_id=1, idDiode=10, Link=https://www.digikey.com/product-detail/en/diodes-incorporated/DDZ9701-7/DDZ9701-7DICT-ND/3877402, MfrPartNo=DDZ9701-7, Name=DDZ9701, Num_Circuits=1, Supplier1=Digi-Key, Type=Zener
D3: library part 12, "DIODE SCHOTTKY 30V 5A TMINIP2", Manufacturer_id=1, MfrPartNo=DB2431200L, Package=SOD-128, Power=30V, Supplier1PartNo=DB2431200LCT-ND, ComponentLink1Description=Datasheet, ComponentLink1URL=https://industrial.panasonic.com/content/data/SC/ds/ds4/DB2431200L_E.pdf, Drawer_id=1, Ic=5A, idDiode=12, Link=https://www.digikey.com/product-detail/en/panasonic-electronic-components/DB2431200L/DB2431200LCT-ND/3884430, Name=DB2431200L, Num_Circuits=1, Supplier1=Digi-Key, Type=Schottky
D4: library part 1, Package=0805, Drawer_id=1, idLED=1, Manufacturer_id=1, Name=LED_0805_RED, Vf=0.7V
D5 LED LED LED POWER1: library part 2, Manufacturer_id=1, Package=0805, Brightness=7mcd, Drawer_id=1, Id=20mA, idLED=2, Link=https://www.digikey.com/product-detail/en/visual-communications-company-vcc/CMD17-21VGD-TR8/L62505CT-ND/254936, Name=CMD17_0805_GREEN, Vf=2.1V
J1: library part 5, "USB Micro Type B", Manufacturer_id=1, ComponentLink1Description=Datasheet, Created_By=Aiku, Created_Date=10/20/2018, Drawer_id=1, idConn=5, Link=https://www.mouser.com/ProductDetail/TE-Connectivity-AMP/1981568-1?qs=sGAEpiMZZMulM8LPOQ%252bykzEIUPbUCiSfqsfxH3Oq%252bYo%3d, MfrPartNo=1981568-1, Name="TE USB Micro", Num_Contacts=5, Supplier1=TE
N1 U8: library part 1, Drawer_id=1, Manufacturer_id=1
  N1: idFuse=3, idShunt=1, Name="Net Tie"
  U8: idMCU=1, Name="MKE18F512VLH16 MCU"
OVP_G1 PWR_IN1 PWR_OUT1 TEST_CANN1 TEST_CANP1 TEST_CANRX1 TEST_CANTX1 TEST_USBD_N1 TEST_USBD_P1 UART_RX1 UART_TX1: library part 5, Manufacturer_id=1, Package=0603, ComponentLink1Description=Datasheet, ComponentLink1URL=https://www.te.com/commerce/DocumentDelivery/DDEController?Action=srchrtrv&DocNm=1773266&DocType=DS&DocLang=English, Drawer_id=1, idTable=5, Link=https://www.digikey.com/product-detail/en/te-connectivity-amp-connectors/RCU-0C/A106145CT-ND/3477802, MfrPartNo=RCU-0C, Name=RCU-0C_Test_Point
P1: library part 4, "2 row connector", Manufacturer_id=1, Voltage_Rating=None, ComponentLink1Description=Datasheet, Created_By=Aiku, Drawer_id=1, idConn=4, Link=https://www.digikey.com/product-detail/en/5103309-1/A33160-ND/1114898?utm_campaign=buynow&WT.z_cid=ref_octopart_dkc_buynow&utm_medium=aggregator&curr=usd&site=us&utm_source=octopart, MfrPartNo=5103309-1, Name=CONN_TE_2X5POS, Num_Contacts=10, Num_Rows=2, Pitch=2.54mm
"PTC Fuse1": library part 4, "Fuse", Manufacturer_id=1, MfrPartNo=2920L200, Created_By="Eunice Bernardo", Created_Date=10/27/2018, Drawer_id=1, I_hold=2A, I_max=40A, I_trip=4A, idFuse=4, LatestRevisionDate=17-Jul-2002, LatestRevisionNote="Re-released for DXP Platform.", Link=https://www.digikey.com/product-detail/en/littelfuse-inc/2920L200-24DR/F2872TR-ND/1211346, Name="PTC Poly Fuse Resettable", PackageDescription="Thru-Hole; 2 Leads", PackageReference=PIN-W2/E2.8, Published=8-Jun-2000, Publisher="Altium Limited"
R1 R2 R3 R4 R5 R6 R7 R8 R9 R10: library part 538, Manufacturer_id=1, Package=0805, Power=1/10W, Tolerance=1%, ComponentLink1Description=Datasheet, Created_By="Nick Mah", Created_Date=2018-10-20, Drawer_id=1, idResistor=538, Name=Res_24k_0805_1/10W_1%, Supplier 1=Digi-Key
R11 R12 R13 R14 R15 R16 R17 R18 R19 R20: library part 528, Manufacturer_id=1, Package=0805, Power=1/10W, Tolerance=1%, ComponentLink1Description=Datasheet, Created_By="Nick Mah", Created_Date=2018-10-20, Drawer_id=1, idResistor=528, Name=Res_9.1k_0805_1/10W_1%, Supplier 1=Digi-Key
R21 R32 R36 R39: library part 497, Manufacturer_id=1, Package=0805, Power=1/10W, Tolerance=1%, ComponentLink1Description=Datasheet, Created_By="Nick Mah", Created_Date=2018-10-20, Drawer_id=1, idResistor=497, Name=Res_470_0805_1/10W_1%, Supplier 1=Digi-Key
R22 R23 R24 R25 R26 R27 R28 R29 R30 R31: library part 1809, Manufacturer_id=1, Package=0805, Power=1/4W, Tolerance=5%, ComponentLink1Description=Datasheet, Created_By="Nick Mah", Created_Date=2018-10-20, Drawer_id=1, idResistor=1809, Name=Res_2.2k_0805_1/4W_5%, Supplier 1=Digi-Key
R33: library part 2293, Manufacturer_id=1, Package=0603, Power=1/10W, Tolerance=10%, ComponentLink1Description=Datasheet, Created_By="Nick Mah", Created_Date=2018-10-20, Drawer_id=1, idResistor=2293, Name=Res_100_0603_1/10W_10%, Supplier 1=Digi-Key
R34 R35 R41 R42: library part 721, Manufacturer_id=1, Package=0805, Power=1/4W, Tolerance=1%, ComponentLink1Description=Datasheet, Created_By="Nick Mah", Created_Date=2018-10-20, Drawer_id=1, idResistor=721, Name=Res_1.0k_0805_1/4W_1%, Supplier 1=Digi-Key
R37: library part 1393, Manufacturer_id=1, Package=0603, Power=1/10W, Tolerance=5%, ComponentLink1Description=Datasheet, Created_By="Nick Mah", Created_Date=2018-10-20, Drawer_id=1, idResistor=1393, Name=Res_10k_0603_1/10W_5%, Supplier 1=Digi-Key
R38: library part 313, Manufacturer_id=1, Package=0603, Power=1/10W, Tolerance=1%, ComponentLink1Description=Datasheet, Created_By="Nick Mah", Created_Date=2018-10-20, Drawer_id=1, idResistor=313, Name=Res_10k_0603_1/10W_1%, Supplier 1=Digi-Key
R40: library part 545, Manufacturer_id=1, Package=0805, Power=1/10W, Tolerance=1%, ComponentLink1Description=Datasheet, Created_By="Nick Mah", Created_Date=2018-10-20, Drawer_id=1, idResistor=545, Name=Res_47k_0805_1/10W_1%, Supplier 1=Digi-Key
R43 R44: library part 1340, Manufacturer_id=1, Package=0603, Power=1/10W, Tolerance=5%, ComponentLink1Description=Datasheet, Created_By="Nick Mah", Created_Date=2018-10-20, Drawer_id=1, idResistor=1340, Name=Res_62_0603_1/10W_5%, Supplier 1=Digi-Key
T1: library part 6, "MOSFET N-CHANNEL 30V 5A SOT23", Manufacturer_id=1, Package=SOT-23, Created_By=Angel, Drawer_id=1, Id=2.8A, idFETs=6, Link=https://www.digikey.com/product-detail/en/diodes-incorporated/DMG2302UK-7/DMG2302UK-7DICT-ND/6010163, MfrPartNo=DMG2302UK-7, Name=DMG2302UK-7, Num_Circuits=1, Rds_On=90mOhm, Supplier1=Digi-Key, Vdss=20V, Vgs(Max)=1V, Vgs(typ)=800mV
U1 U7 U10: library part 15, "1.0 A Low Dropout Positive and Adjustable Voltage Regulator", Current_Rating=1A, Dropout_Voltage="1.2V @ 800mA", Manufacturer_id=1, Package=SOT-223-3, Drawer_id=1, idPMIC_Lin=15, Link=https://www.digikey.com/product-detail/en/on-semiconductor/NCP1117ST33T3G/NCP1117ST33T3GOSCT-ND/660708?utm_adgroup=Integrated%20Circuits&slid=&gclid=CjwKCAjwpKveBRAwEiwAo4Pqm-q33kFM8zFNc6HZ2F-pR13_ETd6YlqjCAqcJjAXoyQWdArbQQWp4hoCk3EQAvD_BwE, MfrPartNo=NCP1117ST33T3G, Name="3.3V 1.0A LDO", Num_Outputs=1, Vin(Max)=20V, Vout(Max)=3.3V
U2 U3 U4 U5 U6: library part 1, "IC OPAMP JFET 5MHZ 8SO", Package=8-SO, Supplier1PartNo=LT1057IS8#PBF-ND, Supply_Voltage=10~18, Amplifier_Type=JFET, Created_By="Albert Panuco", Drawer_id=1, GBW=5MHz, idOp_Amp=1, Link=https://www.digikey.com/product-detail/en/linear-technology-analog-devices/LT1057IS8-PBF/LT1057IS8-PBF-ND/961410, Manufacturer_id=1, MfrPartNo=LT1057IS8#PBF, Name="OPAMP JFET", Num_Circuits=2, Slew_Rate="13 V/us", Supplier1=Digikey
U9: library part 5, Manufacturer_id=1, MfrPartNo=MCP2561, Package=SOIC-8, Created_By="Angel Delgado", Data_Rate=1Mbps, Drawer_id=1, idIC_Interface=5, Link=https://www.digikey.com/product-detail/en/microchip-technology/MCP2561T-E-SN/MCP2561T-E-SNCT-ND/5148846, Name="CAN Transceiver", Num_Circuits=1, Protocol=CAN, Type=Transceiver, Vin(Max)=5.5V, Vin(Min)=4.5V
U11: library part 3, Manufacturer_id=1, Created_By=Kyle, Drawer_id=1, idIC_Interface=3, Link=https://www.digikey.com/product-detail/en/ftdi-future-technology-devices-international-ltd/FT232RL-REEL/768-1007-1-ND/1836402, MfrPartNo=FT232RL, Name="USB FTDI", Protocol=UART, Vin(Max)=5.25, Vin(Min)=3.3
X1: library part 21, "4 row connector", Manufacturer_id=1, ComponentLink1Description=Datasheet, Created_By=Angel, Drawer_id=1, idConn=21, Link=https://www.te.com/usa-en/product-6437288-4.html#guest-click, MfrPartNo=6437288-4, Name="AMP Superseal 90Deg", Num_Contacts=26, Num_Rows=4, Pitch=3mm, Supplier1=TE
X2: library part 15, "2 row 4 pin Board", Manufacturer_id=1, ComponentLink1Description=Datasheet, Created_By=Angel, Drawer_id=1, idConn=15, Link=https://www.te.com/usa-en/product-DTF13-4P.html, MfrPartNo=DTF13-4P, Name=DTF13-4P, Num_Contacts=4, Supplier1=TE

## Free pads (board coordinates)
  round 5 hole 3.5: 1(86.8,116.7) 1(86.8,160.7) 1(167.5,115.7) 1(167.5,161.7)

## Via types
v1: diameter 0.762, hole 0.381, Top Layer to Bottom Layer, 54 vias
v2: diameter 1.27, hole 0.711, Top Layer to Bottom Layer, 18 vias

## Nets (pads, with @x,y where several pads share a name; then routed paths per layer and width w, separated by ;. In a path a pad name is that pad's centre, name@x,y a point inside that pad or via, vN(x,y) a via of type N, cw(c..) or ccw(c..) an arc to the next point about the centre after c; other vN are vias at no path point)
12V: "PTC Fuse1.1" C1.2 C13.2 C19.2 D2.2 D3.2 PWR_OUT1.1 R39.2 T1.3 U1.3 U7.3 U10.3 | length 87.9
  Top Layer w0.254: 147.3,125.6 146.5,126.4 C19.2@146.5,134.3 146.5,135.1 147.4,136 U10.3@148.8,136 ; PWR_OUT1.1@153.5,122.3 153.6,122.4 155.9,122.4 D2.2@156.025,122.4 R39.2@156.025,120.1 ; 155.7,132.1 155.9,131.9 155.9,132.5 156,132.6 ; D3.2@155.8,129.25 155.75,129.2 D3.2@155.9,129.05 ; R39.2@155.9,120.2 R39.2@156,120.1 ; D2.2@155.9,122.6 D2.2@156,122.5
  Top Layer w0.381: D2.2@155.9,122.4 T1.3@155.9,125.6
  Top Layer w0.5: U7.3@124.25,120.3 U7.3@124.55,120
  Top Layer w0.635: U1.3@101.85,118.4 103.9,118.4 103.9,119.5 104.7,120.3 U7.3@124.25,120.3 ; U7.3@124.55,120 C13.2@129,120 129,122.3 132.3,125.6 147.3,125.6 T1.3@155.9,125.6 D3.2@155.9,129.35 ; D3.2@155.8,129.25 155.8,131.8 155.9,131.9
"12V PWR": "PTC Fuse1.2" PWR_IN1.1 X2.1 | length 12.5
  Top Layer w0.254: 158.2,137.4 158.324,137.276
  Top Layer w0.762: 158.1,138.8 PWR_IN1.1@158.1,142.5 ; 158.324,137.276 X2.1@166.977,137.276
+10V: *4.8 C26.1 C27.2 C28.2 C29.2 C30.2 C31.2 U2.6 U3.6 U4.6 U5.6 U6.6 | length 58
  Top Layer w0.254: v1(110.6,125.35) 110.646,125.304 111.486,125.304 U2.6@112.075,124.715 ; v1(110.6,134.05) 110.646,134.004 111.486,134.004 U3.6@112.075,133.415 ; v1(110.6,142.75) 110.646,142.704 111.486,142.704 U4.6@112.075,142.115 ; v1(110.6,151.45) 110.646,151.404 111.486,151.404 U5.6@112.075,150.815 ; v1(110.6,160.15) 110.646,160.104 111.486,160.104 U6.6@112.075,159.515
  Bottom Layer w0.254: C27.2@110.55,121.6 110.55,116.55 112.005,115.095 *4.8@113.525,115.095 113.525,113.125 C26.1@113.5,113.1 ; v1(110.6,125.35) C28.2@110.6,130.4 ; v1(110.6,134.05) C29.2@110.6,139 ; v1(110.6,142.75) C30.2@110.6,147.7 ; v1(110.6,151.45) C31.2@110.6,156.4 ; C27.2@110.6,121.6 v1(110.6,125.35) ; C28.2@110.6,130.3 v1(110.6,134.05) ; C29.2@110.6,139 v1(110.6,142.75) ; C30.2@110.6,147.7 v1(110.6,151.45) ; C31.2@110.6,156.4 v1(110.6,160.15)